# Altium PCB ThreePhaseMLI.PcbDoc (part 1 of 3)
Units mm, origin at the board's own origin, x right, y up, seen from the top; angles counter-clockwise.
Board outline 158.68 x 188.03 mm, 2 copper layers (Top Layer, Bottom Layer); 228 components, 175 nets, 606 pads, 93 vias.
Unrouted connection lines stored in the file: 12.
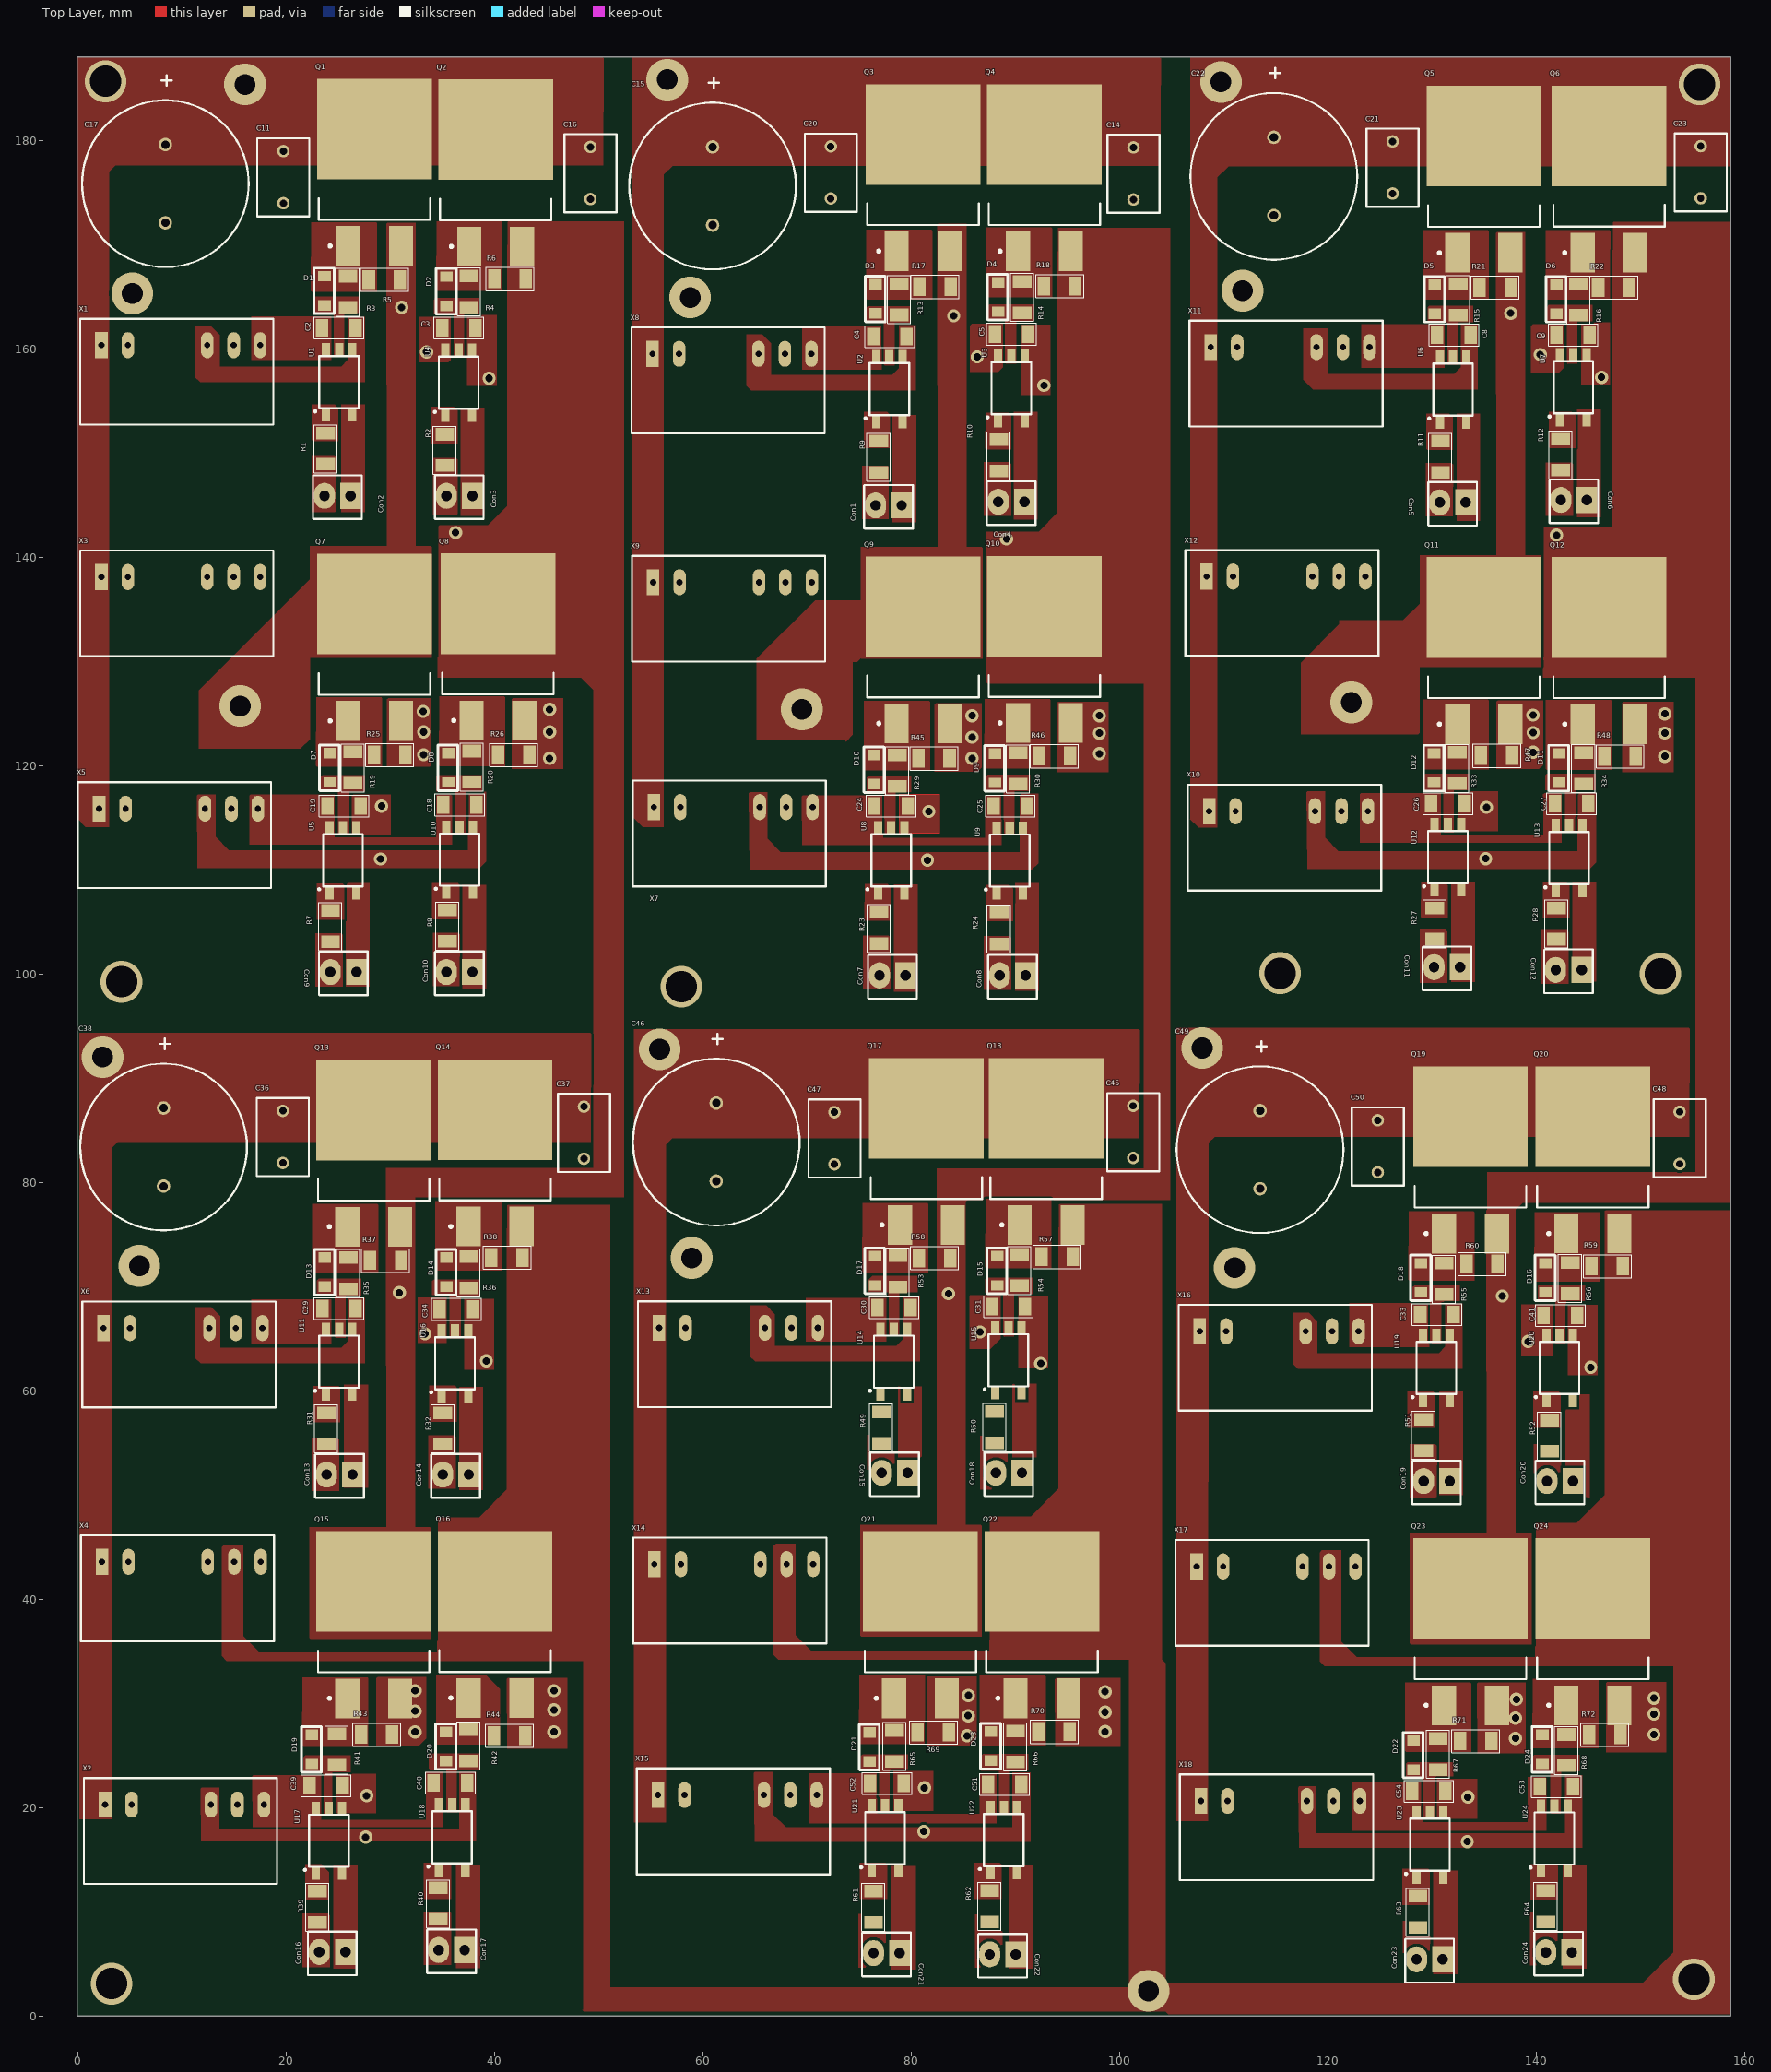
[diagram p0: Top Layer view]
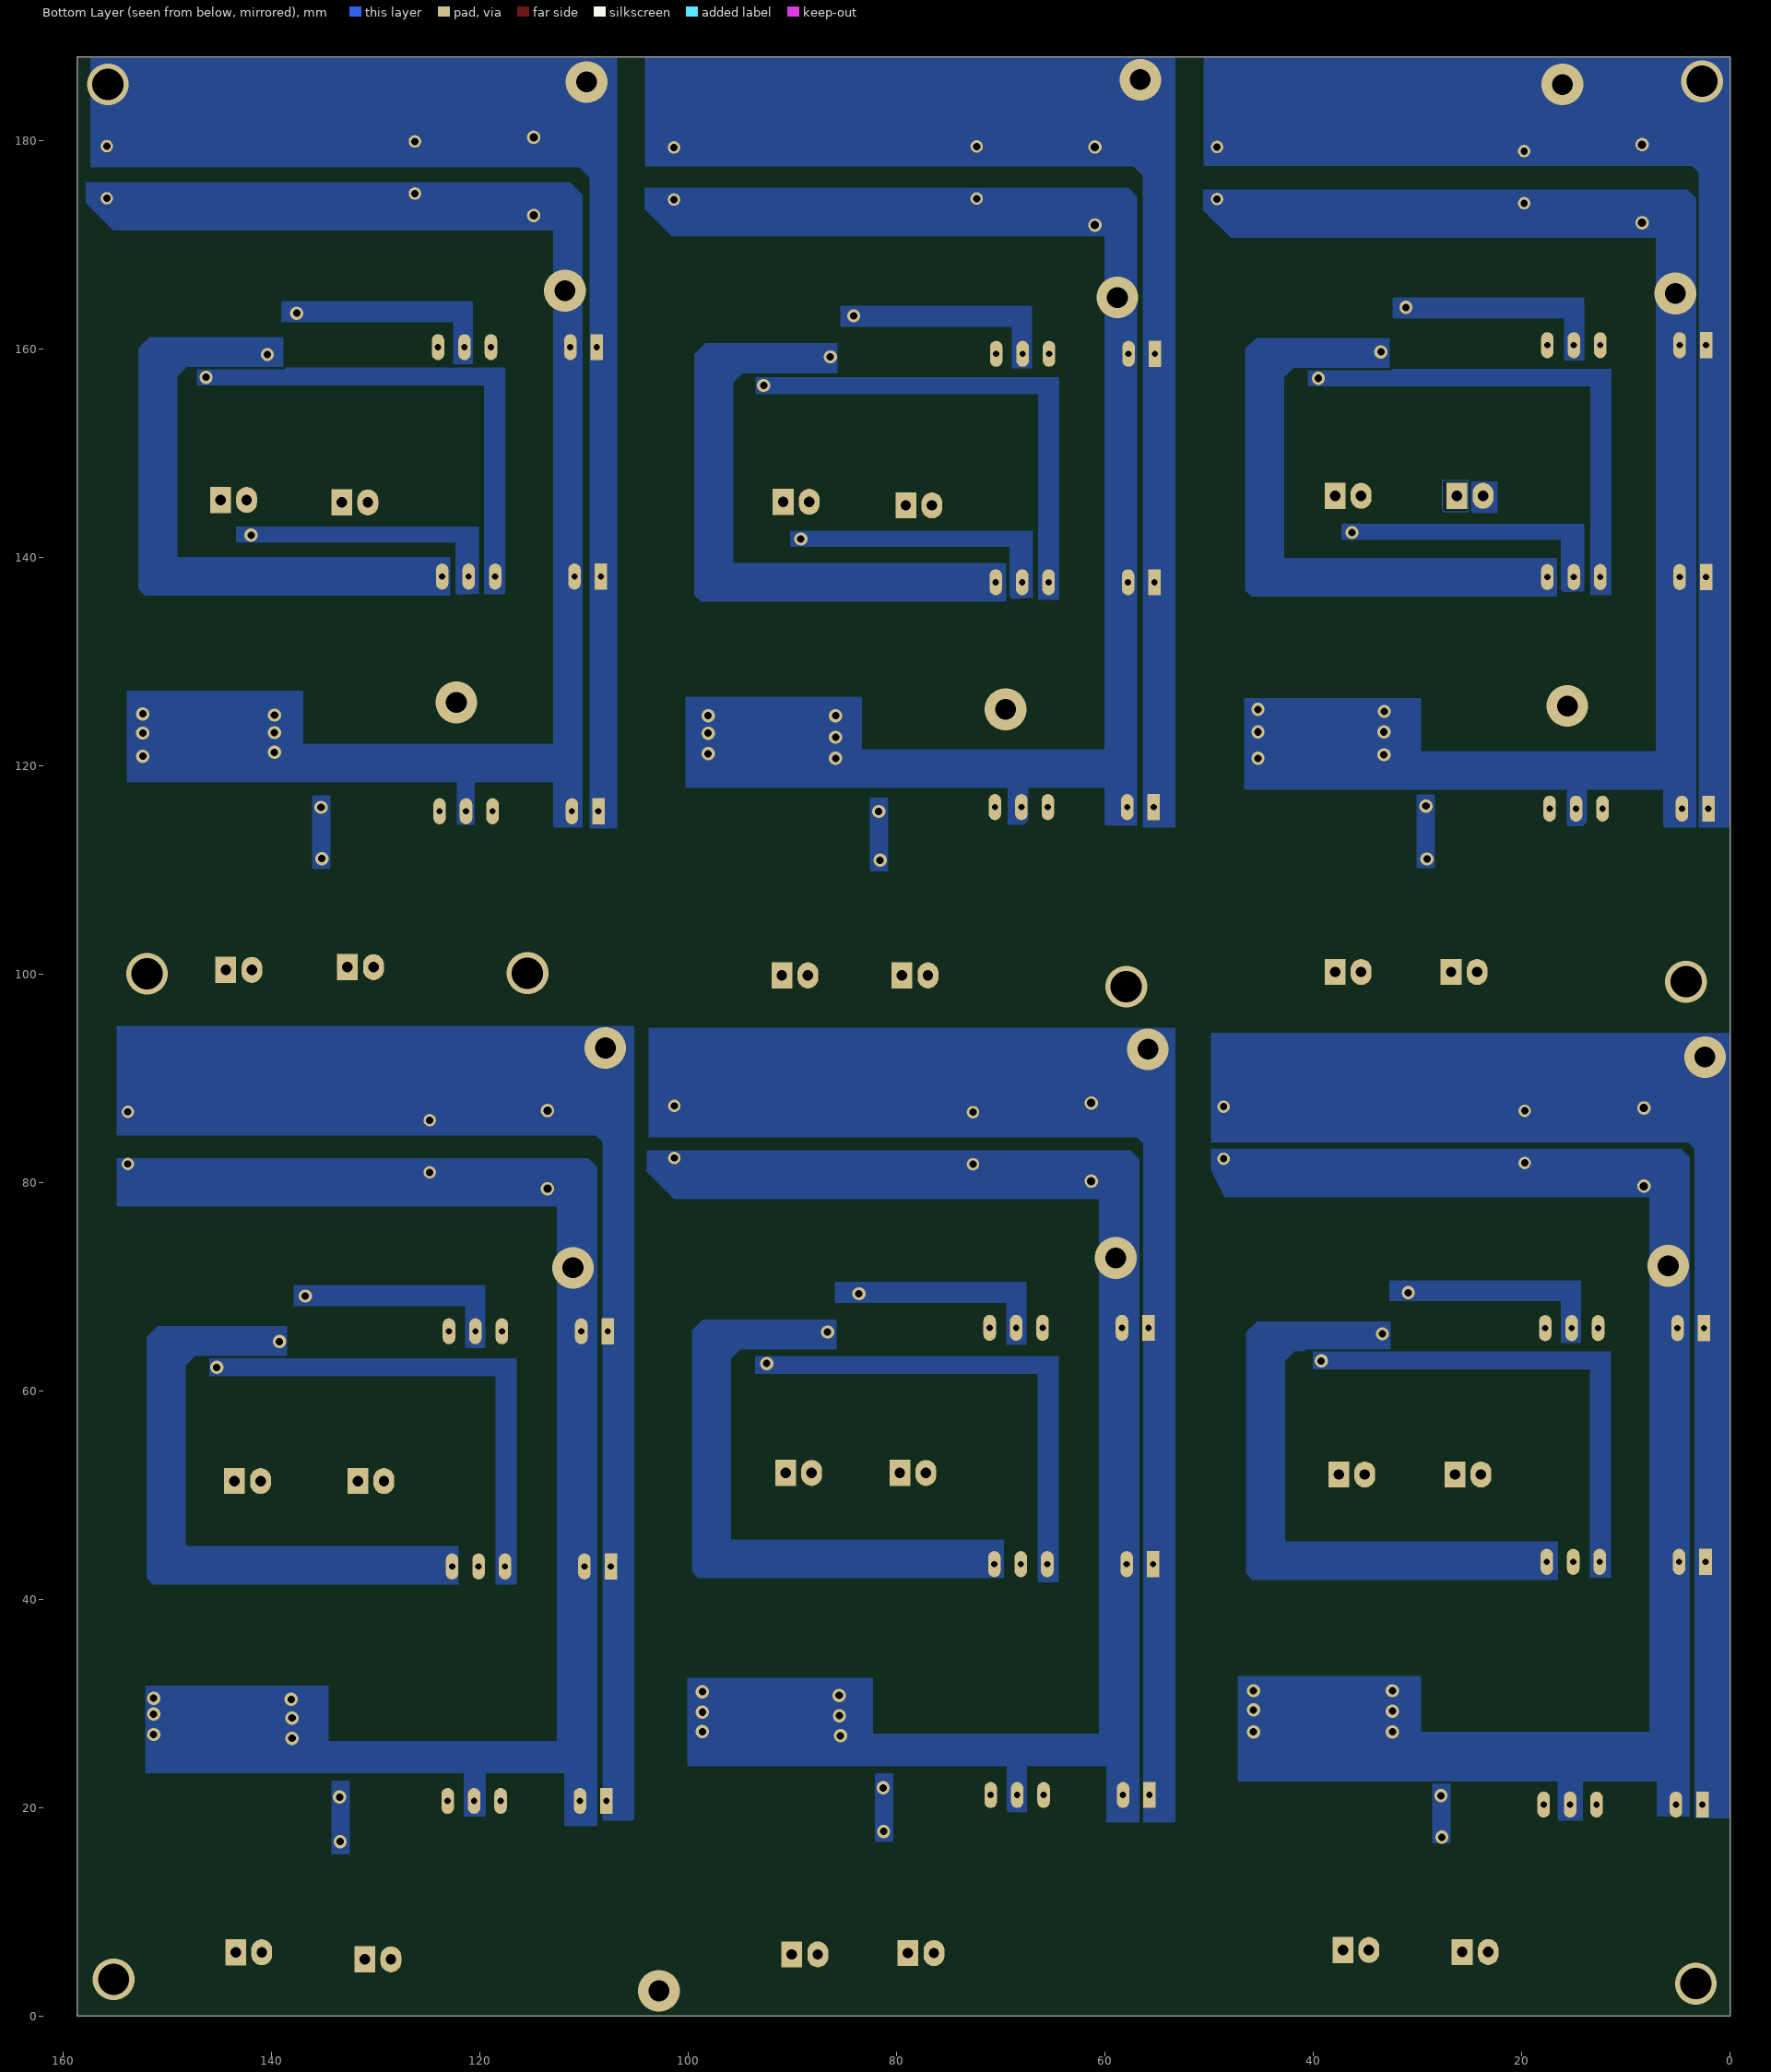
[diagram p1: Bottom Layer view, seen from below]
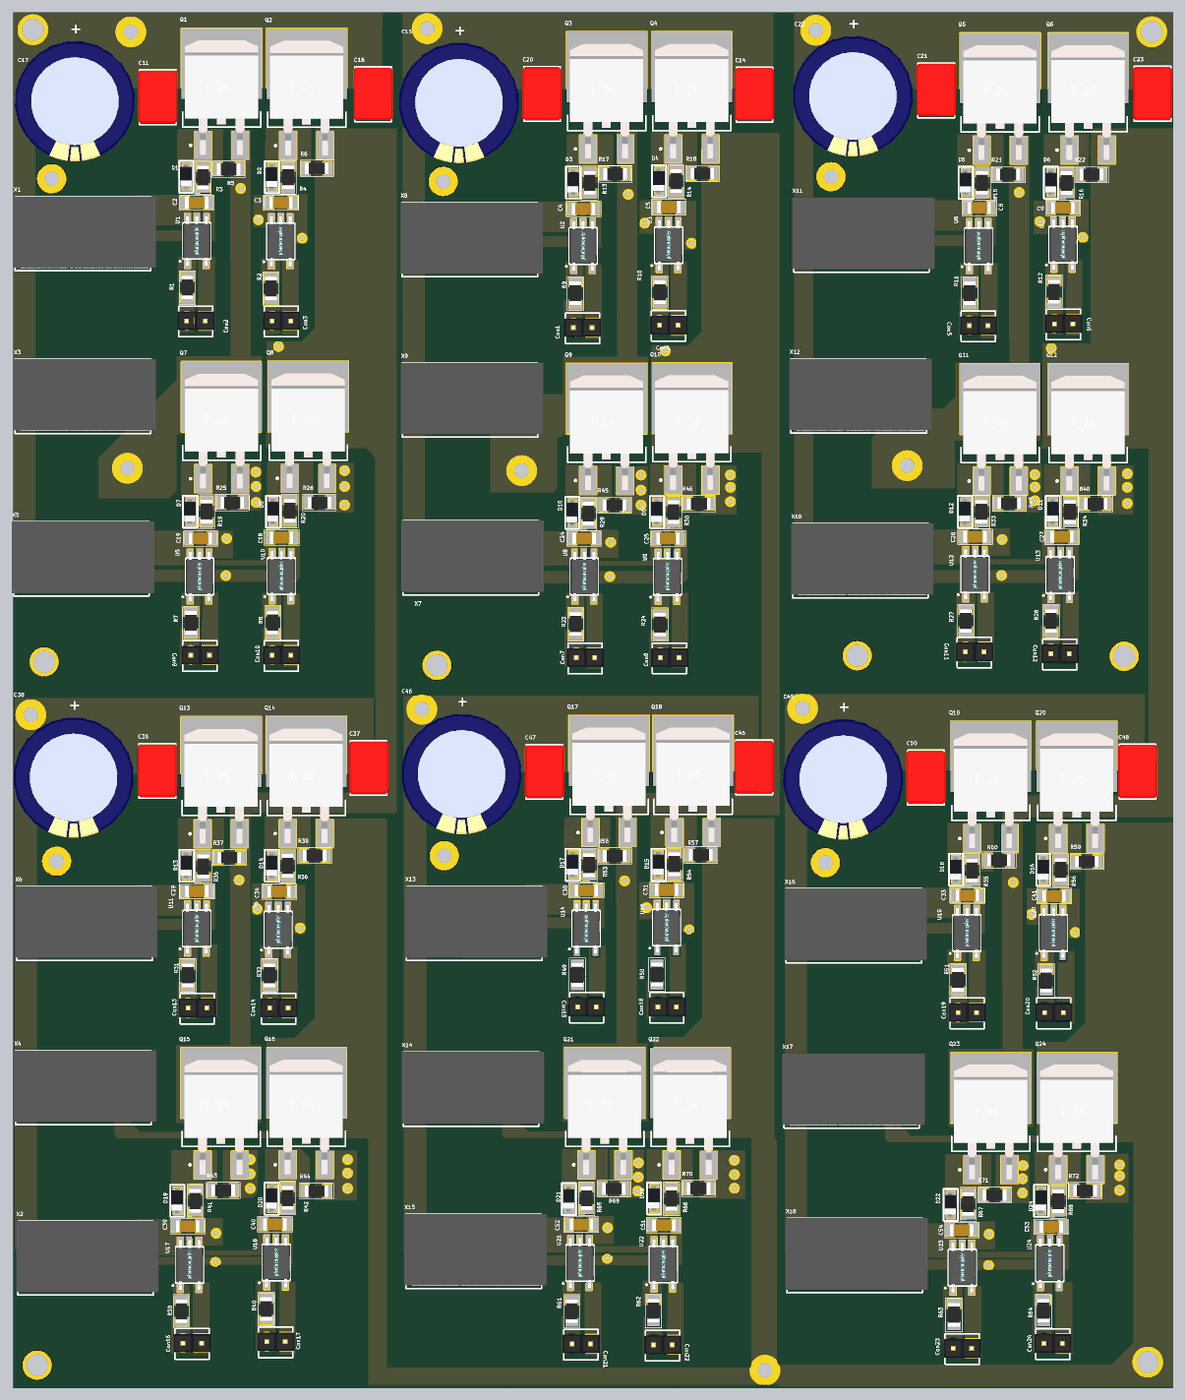
[diagram p3: 3D render of the assembled board from above, using the file's embedded part models]

## Layer stack, top to bottom
Top Solder: solder mask 0.0102, Solder Resist, Dk 3.5
Top Layer: signal copper 0.0356
Dielectric 1: dielectric 0.32, FR-4, Dk 4.8
Bottom Layer: signal copper 0.0356
Bottom Solder: solder mask 0.0102, Solder Resist, Dk 3.5

## Board outline
-0.025,0 -0.025,188.025 158.65,188.025 158.65,0

## Design rules (kind name [scope] priority, off if disabled: settings)
Clearance [All] p1: gap=0.254 ignorepadtopadclearanceinfootprint=FALSE except(0: Arc-Hole Track-Hole SMDPad-Hole THPad-Hole Via-Hole Fill-Hole Poly-Hole Region-Hole Text-Hole)
Height [All] p1: minheight=0 maxheight=76.2 prefheight=12.7
PolygonConnect [All] p1: connectstyle=Direct reliefconductorwidth=0.254 reliefentries=4 polygonreliefangle="90 Angle" airgapwidth=0.254
RoutingVias [All] p1: holewidth=0.711 width=1.27 viastyle="Through Hole" minholewidth=0.711 minwidth=1.27 maxholewidth=0.711 maxwidth=1.27
SolderMaskExpansion [All] p1: expansion=0.102 istentingtop=FALSE
Width [All] p1: maxlimit=1 minlimit=0.254 preferedwidth=0.254 minimp=50.000000 maximp=50.000000 favimp=50.000000
29 further rules are at their usual default settings.

## Components (designator, comment, footprint, x,y, rotation, side; value= is the part's Value field where it differs from the comment)
C2 "uF" C-1206 25.075,162.025 r180 top
C3 "uF" C-1206 36.6,162.025 r180 top
C4 "uF" C-1206 77.975,161.175 r180 top
C5 "uF" C-1206 89.65,161.425 r180 top
C8 "uF" C-1206 132.1,161.325 r180 top
C9 "uF" C-1206 143.55,161.325 r180 top
C11 "470pF" "100v 470pF" 19.75,173.975 r90 top
C14 "470pF" "100v 470pF" 101.35,174.325 r90 top
C15 "50v 4700uF" "63v 2200uF" 60.95,171.875 r90 top
C16 "470pF" "100v 470pF" 49.225,174.375 r90 top
C17 "50v 4700uF" "63v 2200uF" 8.425,172.1 r90 top
C18 "uF" C-1206 36.675,116.25 r180 top
C19 "uF" C-1206 25.575,116.125 r180 top
C20 "470pF" "100v 470pF" 72.3,174.425 r90 top
C21 "470pF" "100v 470pF" 126.225,174.9 r90 top
C22 "50v 4700uF" "63v 2200uF" 114.825,172.8 r90 top
C23 "470pF" "100v 470pF" 155.8,174.45 r90 top
C24 "uF" C-1206 78.075,116.125 r180 top
C25 "uF" C-1206 89.525,116.125 r180 top
C26 "uF" C-1206 131.525,116.35 r180 top
C27 "uF" C-1206 143.396,116.35 r180 top
C29 "uF" C-1206 25.1,67.9 r180 top
C30 "uF" C-1206 78.375,68 r180 top
C31 "uF" C-1206 89.35,68.075 r180 top
C33 "uF" C-1206 130.475,67.325 r180 top
C34 "uF" C-1206 36.35,67.85 r180 top
C36 "470pF" "100v 470pF" 19.7,81.875 r90 top
C37 "470pF" "100v 470pF" 48.6,82.275 r90 top
C38 "50v 4700uF" "63v 2200uF" 8.25,79.65 r90 top
C39 "uF" C-1206 23.85,22.114 r180 top
C40 "uF" C-1206 35.775,22.375 r180 top
C41 "uF" C-1206 142.325,67.25 r180 top
C45 "470pF" "100v 470pF" 101.325,82.35 r90 top
C46 "50v 4700uF" "63v 2200uF" 61.3,80.125 r90 top
C47 "470pF" "100v 470pF" 72.65,81.75 r90 top
C48 "470pF" "100v 470pF" 153.775,81.775 r90 top
C49 "50v 4700uF" "63v 2200uF" 113.5,79.4 r90 top
C50 "470pF" "100v 470pF" 124.8,80.975 r90 top
C51 "uF" C-1206 88.975,22.25 r180 top
C52 "uF" C-1206 77.682,22.325 r180 top
C53 "uF" C-1206 141.95,22.025 r180 top
C54 "uF" C-1206 129.7,21.575 r180 top
Con1 "Connector2" Conn 79.075,144.975 r270 top
Con2 "Connector2" Conn 26.176,145.9 r270 top
Con3 "Connector2" Conn 37.875,145.9 r270 top
Con4 "Connector2" Conn 90.85,145.325 r270 top
Con5 "Connector2" Conn 133.219,145.26 r270 top
Con6 "Connector2" Conn 144.85,145.5 r270 top
Con7 "Connector2" Conn 79.45,99.875 r270 top
Con8 "Connector2" Conn 90.975,99.875 r270 top
Con9 "Connector2" Conn 26.741,100.2 r270 top
Con10 "Connector2" Conn 37.876,100.2 r270 top
Con11 "Connector2" Conn 132.675,100.667 r270 top
Con12 "Connector2" Conn 144.35,100.4 r270 top
Con13 "Connector2" Conn 26.375,51.975 r270 top
Con14 "Connector2" Conn 37.525,51.975 r270 top
Con15 "Connector2" Conn 79.65,52.125 r270 top
Con16 "Connector2" Conn 25.675,6.15 r270 top
Con17 "Connector2" Conn 37.125,6.35 r270 top
Con18 "Connector2" Conn 90.616,52.125 r270 top
Con19 "Connector2" Conn 131.675,51.35 r270 top
Con20 "Connector2" Conn 143.516,51.35 r270 top
Con21 "Connector2" Conn 78.875,6.05 r270 top
Con22 "Connector2" Conn 90.025,5.925 r270 top
Con23 "Connector2" Conn 131.001,5.45 r270 top
Con24 "Connector2" Conn 143.4,6.125 r270 top
D1 "1n4148" B5819 23.701,164.175 r90 top
D2 "1n4148" B5819 35.4,164.125 r90 top
D3 "1n4148" B5819 76.6,163.4 r90 top
D4 "1n4148" B5819 88.35,163.575 r90 top
D5 "1n4148" B5819 130.275,163.375 r90 top
D6 "1n4148" B5819 141.95,163.375 r90 top
D7 "1n4148" B5819 24.201,118.4 r90 top
D8 "1n4148" B5819 35.572,118.4 r90 top
D9 "1n4148" B5819 88.05,118.35 r90 top
D10 "1n4148" B5819 76.475,118.231 r90 top
D11 "1n4148" B5819 142.2,118.375 r90 top
D12 "1n4148" B5819 130.2,118.375 r90 top
D13 "1n4148" B5819 23.725,70 r90 top
D14 "1n4148" B5819 35.397,70 r90 top
D15 "1n4148" B5819 88.275,70.125 r90 top
D16 "1n4148" B5819 140.9,69.45 r90 top
D17 "1n4148" B5819 76.543,70.125 r90 top
D18 "1n4148" B5819 128.95,69.45 r90 top
D19 "1n4148" B5819 22.475,24.2 r90 top
D20 "1n4148" B5819 35.375,24.481 r90 top
D21 "1n4148" B5819 76.025,24.425 r90 top
D22 "1n4148" B5819 128.225,23.65 r90 top
D23 "1n4148" B5819 87.675,24.525 r90 top
D24 "1n4148" B5819 140.6,24.2 r90 top
Q1 "irfz44" DPAK_TO263 28.493,176.076 r90 top
Q2 "irfz44" DPAK_TO263 40.125,176.025 r90 top
Q3 "irfz44" DPAK_TO263 81.148,175.577 r90 top
Q4 "irfz44" DPAK_TO263 92.8,175.575 r90 top
Q5 "irfz44" DPAK_TO263 134.973,175.412 r90 top
Q6 "irfz44" DPAK_TO263 147,175.425 r90 top
Q7 "irfz44" DPAK_TO263 28.493,130.5 r90 top
Q8 "irfz44" DPAK_TO263 40.35,130.537 r90 top
Q9 "irfz44" DPAK_TO263 81.148,130.25 r90 top
Q10 "irfz44" DPAK_TO263 92.8,130.3 r90 top
Q11 "irfz44" DPAK_TO263 134.973,130.181 r90 top
Q12 "irfz44" DPAK_TO263 147,130.181 r90 top
Q13 "irfz44" DPAK_TO263 28.425,81.95 r90 top
Q14 "irfz44" DPAK_TO263 40.075,81.975 r90 top
Q15 "irfz44" DPAK_TO263 28.425,36.695 r90 top
Q16 "irfz44" DPAK_TO263 40.075,36.725 r90 top
Q17 "irfz44" DPAK_TO263 81.475,82.125 r90 top
Q18 "irfz44" DPAK_TO263 92.965,82.125 r90 top
Q19 "irfz44" DPAK_TO263 133.69,81.3 r90 top
Q20 "irfz44" DPAK_TO263 145.45,81.3 r90 top
Q21 "irfz44" DPAK_TO263 80.9,36.7 r90 top
Q22 "irfz44" DPAK_TO263 92.575,36.7 r90 top
Q23 "irfz44" DPAK_TO263 133.69,36.031 r90 top
Q24 "irfz44" DPAK_TO263 145.45,36.031 r90 top
R1 "R-1206" R-1206 23.825,150.425 r90 top
R2 "R-1206" R-1206 35.25,150.3 r90 top
R3 "R-1206" R-1206 25.953,165.475 r90 top
R4 "R-1206" R-1206 37.585,165.5 r90 top
R5 "R-1206" R-1206 29.45,166.65 r180 top
R6 "R-1206" R-1206 41.5,166.725 r180 top
R7 "R-1206" R-1206 24.275,104.6 r90 top
R8 "R-1206" R-1206 35.5,104.65 r90 top
R9 "R-1206" R-1206 76.9,149.65 r90 top
R10 "R-1206" R-1206 88.425,149.775 r90 top
R11 "R-1206" R-1206 130.825,149.65 r90 top
R12 "R-1206" R-1206 142.35,149.85 r90 top
R13 "R-1206" R-1206 78.865,164.756 r90 top
R14 "R-1206" R-1206 90.675,164.975 r90 top
R15 "R-1206" R-1206 132.518,164.746 r90 top
R16 "R-1206" R-1206 144.077,164.72 r90 top
R17 "R-1206" R-1206 82.3,165.975 r180 top
R18 "R-1206" R-1206 94.25,166.025 r180 top
R19 "R-1206" R-1206 26.425,119.817 r90 top
R20 "R-1206" R-1206 37.85,119.9 r90 top
R21 "R-1206" R-1206 136.05,165.9 r180 top
R22 "R-1206" R-1206 147.45,165.9 r180 top
R23 "R-1206" R-1206 76.925,104.425 r90 top
R24 "R-1206" R-1206 88.45,104.375 r90 top
R25 "R-1206" R-1206 29.95,121.05 r180 top
R26 "R-1206" R-1206 41.85,121.05 r180 top
R27 "R-1206" R-1206 130.275,104.85 r90 top
R28 "R-1206" R-1206 141.95,104.85 r90 top
R29 "R-1206" R-1206 78.675,119.525 r90 top
R30 "R-1206" R-1206 90.296,119.731 r90 top
R31 "R-1206" R-1206 23.875,56.4 r90 top
R32 "R-1206" R-1206 35.05,56.4 r90 top
R33 "R-1206" R-1206 132.425,119.775 r90 top
R34 "R-1206" R-1206 144.55,119.75 r90 top
R35 "R-1206" R-1206 26,71.3 r90 top
R36 "R-1206" R-1206 37.55,71.366 r90 top
R37 "R-1206" R-1206 29.55,72.525 r180 top
R38 "R-1206" R-1206 41.205,72.8 r180 top
R39 "R-1206" R-1206 23.025,10.5 r90 top
R40 "R-1206" R-1206 34.605,10.8 r90 top
R41 "R-1206" R-1206 24.9,25.575 r90 top
R42 "R-1206" R-1206 37.535,25.981 r90 top
R43 "R-1206" R-1206 28.7,27.025 r180 top
R44 "R-1206" R-1206 41.45,26.925 r180 top
R45 "R-1206" R-1206 82.2,120.7 r180 top
R46 "R-1206" R-1206 93.75,120.925 r180 top
R47 "R-1206" R-1206 136.206,120.975 r180 top
R48 "R-1206" R-1206 148.05,120.9 r180 top
R49 "R-1206" R-1206 77.15,56.475 r90 top
R50 "R-1206" R-1206 88.025,56.525 r90 top
R51 "R-1206" R-1206 129.2,55.775 r90 top
R52 "R-1206" R-1206 141.275,55.7 r90 top
R53 "R-1206" R-1206 78.746,71.466 r90 top
R54 "R-1206" R-1206 90.425,71.6 r90 top
R55 "R-1206" R-1206 131.15,70.75 r90 top
R56 "R-1206" R-1206 143.271,70.821 r90 top
R57 "R-1206" R-1206 94.025,72.875 r180 top
R58 "R-1206" R-1206 82.25,72.75 r180 top
R59 "R-1206" R-1206 146.825,71.975 r180 top
R60 "R-1206" R-1206 134.8,72.175 r180 top
R61 "R-1206" R-1206 76.4,10.5 r90 top
R62 "R-1206" R-1206 87.55,10.55 r90 top
R63 "R-1206" R-1206 128.65,10 r90 top
R64 "R-1206" R-1206 140.925,10.55 r90 top
R65 "R-1206" R-1206 78.425,25.925 r90 top
R66 "R-1206" R-1206 90.025,25.875 r90 top
R67 "R-1206" R-1206 130.6,25.15 r90 top
R68 "R-1206" R-1206 142.91,25.525 r90 top
R69 "R-1206" R-1206 82.125,27.25 r180 top
R70 "R-1206" R-1206 93.725,27.3 r180 top
R71 "R-1206" R-1206 134.2,26.4 r180 top
R72 "R-1206" R-1206 146.58,27 r180 top
U1 "TLP152" TLP152 25.35,156.8 r90 top
U2 "TLP152" TLP152 78.175,156.125 r90 top
U3 "TLP152" TLP152 89.875,156.225 r90 top
U4 "TLP152" TLP152 36.825,156.75 r90 top
U5 "TLP152" TLP152 25.725,110.925 r90 top
U6 "TLP152" TLP152 132.279,156.1 r90 top
U7 "TLP152" TLP152 143.825,156.3 r90 top
U8 "TLP152" TLP152 78.35,110.925 r90 top
U9 "TLP152" TLP152 89.725,110.9 r90 top
U10 "TLP152" TLP152 36.925,110.975 r90 top
U11 "TLP152" TLP152 25.35,62.8 r90 top
U12 "TLP152" TLP152 131.775,111.225 r90 top
U13 "TLP152" TLP152 143.425,111.125 r90 top
U14 "TLP152" TLP152 78.6,62.8 r90 top
U15 "TLP152" TLP152 89.6,62.925 r90 top
U16 "TLP152" TLP152 36.479,62.65 r90 top
U17 "TLP152" TLP152 24.369,16.825 r90 top
U18 "TLP152" TLP152 36.2,17.15 r90 top
U19 "TLP152" TLP152 130.675,62.2 r90 top
U20 "TLP152" TLP152 142.5,62.2 r90 top
U21 "TLP152" TLP152 77.75,17.075 r90 top
U22 "TLP152" TLP152 89.154,16.9 r90 top
U23 "TLP152" TLP152 130.05,16.45 r90 top
U24 "TLP152" TLP152 142.003,17.05 r90 top
X1 "R24P21503D" SIP7 2.285,160.35 r90 top
X2 "R24P21503D" SIP7 2.64,20.3 r90 top
X3 "R24P21503D" SIP7 2.285,138.1 r90 top
X4 "R24P21503D" SIP7 2.34,43.6 r90 top
X5 "R24P21503D" SIP7 2.065,115.875 r90 top
X6 "R24P21503D" SIP7 2.49,66.025 r90 top
X7 "R24P21503D" SIP7 55.31,116.025 r90 top
X8 "R24P21503D" SIP7 55.19,159.525 r90 top
X9 "R24P21503D" SIP7 55.235,137.6 r90 top
X10 "R24P21503D" SIP7 108.615,115.625 r90 top
X11 "R24P21503D" SIP7 108.765,160.165 r90 top
X12 "R24P21503D" SIP7 108.365,138.15 r90 top
X13 "R24P21503D" SIP7 55.815,66.05 r90 top
X14 "R24P21503D" SIP7 55.365,43.375 r90 top
X15 "R24P21503D" SIP7 55.715,21.221 r90 top
X16 "R24P21503D" SIP7 107.715,65.725 r90 top
X17 "R24P21503D" SIP7 107.415,43.15 r90 top
X18 "R24P21503D" SIP7 107.84,20.65 r90 top

## Footprints (in the part's own frame and the unit in brackets; to place one, negate y for a bottom-side part, rotate by r counter-clockwise, add the part's x,y. Pads: shape width x height; smd on the part's side, far side on the other; paste and mask are expansions set on the pad)
"63v 2200uF" [mm]
  round 1.3 hole 0.8: 1(0,0) 2(7.5,0)
  silkscreen extent -4.25,-8 14.16,8, body extent -4.44,-8.25 12.06,8.25, height 26.11
"100v 470pF" [mm]
  round 1.2 hole 0.7: 1(0,0) 2(5,0)
  silkscreen extent -1.27,-2.5 6.22,2.5, body extent -1.06,-2.7 6.14,2.7, height 7
B5819 [mm]
  rect 1x1.2 smd: 1(0,0) 2(2.8,0)
  silkscreen extent -0.8,-0.92 3.57,1, body extent -0.45,-0.72 3.25,0.88, height 1.28
C-1206 [mm]
  rect 1.2x1.7 smd: 1(-1.6,0) 2(1.6,0)
  silkscreen extent -2.4,-1.05 2.37,1.05, body extent -1.6,-0.8 1.6,0.8, height 1
Conn [mm]
  rect 2.5x2 hole 1: 1(0,0.025)
  oval 2.5x2 hole 1: 2(0,-2.475)
  silkscreen extent -1.96,-3.57 2.22,1.1, body extent -5,-3.74 1.3,1.34, height 8.15
DPAK_TO263 [mm] "D2-PAK, 3-Pads, Body 7.93x8.70mm (max), IPC Medium Density"
  rect 3.81x2.32 smd: 1(-6.2,2.54) 3(-6.2,-2.54)
  rect 9.65x11 smd: 2(5,0)
  silkscreen extent -6.32,-5.35 -1.62,5.35, body extent -7.51,-4.98 8.16,5.02, height 4.81
R-1206 [mm]
  rect 1.2x1.8 smd: 1(-1.5,0) 2(1.5,0)
  silkscreen extent -2.32,-1.1 2.27,1.12, body extent -1.6,-0.78 1.6,0.83, height 0.56
SIP7 [mm]
  rect 2.5x1.2 hole 0.6: 1(0,0)
  oval 2.5x1.2 hole 0.6: 2(0,-2.54) 5(0,-10.16) 6(0,-12.7) 7(0,-15.24)
  silkscreen extent -7.62,-16.51 2.54,2.03, body extent -7.24,-17.24 2.58,2.26, height 11.66
TLP152 [mm] "SOTFL, 5-Leads, Body 3.75x7.20mm, Pitch 1.27mm, IPC Medium Density"
  rect 1.2x0.8 smd: 1(-3.15,1.524) 2(-3.15,-1.016) 3(3.15,-1.016) 4(3.15,0.254) 5(3.15,1.524)
  silkscreen extent -2.87,-1.65 2.5,2.61, body extent -3.39,-1.65 3.38,2.15, height 2.11

## Part data
C2 C3 C4 C5 C8 C9 C18 C19 C24 C25 C26 C27 C29 C30 C31 C33 C34 C39 C40 C41 C51 C52 C53 C54: library part C-1206
C11 C14 C16 C20 C21 C23 C36 C37 C45 C47 C48 C50: library part "100v 470p cap"
C15 C17 C22 C38 C46 C49: library part "Aluminum Electrolytic Capacitors", "PKL5-063V472MM450 Aluminum Electrolytic Capacitors - Snap In 63volts 4700uF 20%", Capacitance=4.7mF, Case/Package=Radial, Manufacturer=Nichicon, Manufacturer Part Number=LKS1J472MESZ, Max Operating Temperature=85°C, Min Operating Temperature=-40°C, Package Quantity=250, Ripple Current=3A, Supplier Part Number 1=647-LKS1J472MESZ, Tolerance=20%, Voltage Rating=63V, ComponentLink2Description=https://www.ozdisan.com/pasif-komponentler/kondansatorler/aluminyum-kondansatorler/PKL5-063V472MM450, ComponentLink2URL=https://www.ozdisan.com/pasif-komponentler/kondansatorler/aluminyum-kondansatorler/PKL5-063V472MM450, Diameter=22mm, Height - Seated (Max)=1.772inch, Lead Pitch=0.394inch, Length=45mm, Life (Hours)=1000Hour, Mount="Through Hole", Packaging=Bulk, RoHS=Yes, Supplier 1=Mouser, Termination="Snap in", Voltage Rating (DC)=63V
D1 D2 D3 D4 D5 D6 D7 D8 D9 D10 D11 D12 D13 D14 D15 D16 D17 D18 D19 D20 D21 D22 D23 D24: library part 1N4148W-E3-18, "Diode Small Signal Switching 100V 0.15A 2-Pin SOD-123 T/R", Average Rectified Current=150mA, Forward Voltage=1.2V, Manufacturer=Vishay, Max Operating Temperature=150°C, Max Power Dissipation=350mW, Max Repetitive Reverse Voltage (Vrrm)=100V, Max Reverse Leakage Current=5uA, Max Reverse Voltage (DC)=75V, Max Surge Current=2A, Min Operating Temperature=-55°C, Package Quantity=10000, Peak Reverse Current=100uA, Supplier Part Number 1=70061597, ComponentLink1Description=https://datasheet.ciiva.com/29885/1n4148w-29885941.pdf?src-supplier=Avnet, ComponentLink1URL=https://datasheet.ciiva.com/29885/1n4148w-29885941.pdf?src-supplier=Avnet, ComponentLink2Description=https://datasheet.ciiva.com/29593/1n4148w-29593113.pdf?src-supplier=Digi-Key, ComponentLink2URL=https://datasheet.ciiva.com/29593/1n4148w-29593113.pdf?src-supplier=Digi-Key, ComponentLink3Description=https://datasheet.ciiva.com/29593/1n4148w-29593111.pdf?src-supplier=Digi-Key, ComponentLink3URL=https://datasheet.ciiva.com/29593/1n4148w-29593111.pdf?src-supplier=Digi-Key, ComponentLink4Description=https://datasheet.ciiva.com/29593/1n4148w-29593112.pdf?src-supplier=Digi-Key, ComponentLink4URL=https://datasheet.ciiva.com/29593/1n4148w-29593112.pdf?src-supplier=Digi-Key, Contact Plating=Tin, Element Configuration=Single, Forward Current=150mA, Height=1.25mm, Lead Free="Lead Free", Length=2.85mm, Manufacturer Part Number=1N4148W-E3-18, Mount="Surface Mount", Number of Pins=2, Packaging="Tape and Reel", Peak Non-Repetitive Surge Current=2A, Power Dissipation=350mW, Pricing 1="1 = 0.03900, 25 = 0.03800, 100 = 0.03600, 250 = 0.03400, 500 = 0.03200, 1000 = 0.03100, 2500 = 0.02900 (USD)", Radiation Hardening=No, Recovery Time=4ns, Reverse Recovery Time=4ns, RoHS=Yes, Stock 1=6838, Supplier 1="Allied Electronics", Weight=0.000363oz, Width=1.7mm
Q1 Q2 Q3 Q4 Q5 Q6 Q7 Q8 Q9 Q10 Q11 Q12 Q13 Q14 Q15 Q16 Q17 Q18 Q19 Q20 Q21 Q22 Q23 Q24: library part "To220 Mosfet"
R1 R2 R3 R4 R5 R6 R7 R8 R9 R10 R11 R12 R13 R14 R15 R16 R17 R18 R19 R20 R21 R22 R23 R24 R25 R26 R27 R28 R29 R30 R31 R32 R33 R34 R35 R36 R37 R38 R39 R40 R41 R42 R43 R44 R45 R46 R47 R48 R49 R50 R51 R52 R53 R54 R55 R56 R57 R58 R59 R60 R61 R62 R63 R64 R65 R66 R67 R68 R69 R70 R71 R72: "Res1206"
U1 U2 U3 U4 U5 U6 U7 U8 U9 U10 U11 U12 U13 U14 U15 U16 U17 U18 U19 U20 U21 U22 U23 U24: library part TLP152(TPL,E, "OPTOISO 3.75KV GATE DRIVER 6SO-5", Case/Package=SO, Forward Current=10mA, Forward Voltage=1.57V, High Level Output Current=2A, Manufacturer=Toshiba, Max Operating Temperature=100°C, Max Output Current=2.5A, Max Power Dissipation=260mW, Min Operating Temperature=-40°C, Package Quantity=3000, Supplier Part Number 1=757-TLP152TPLE, ComponentLink1Description=https://datasheet.ciiva.com/41848/tlp152-datasheet-en-20120914-41848928.pdf?src-supplier=Digi-Key, ComponentLink1URL=https://datasheet.ciiva.com/41848/tlp152-datasheet-en-20120914-41848928.pdf?src-supplier=Digi-Key, Direction=Unidirectional, Fall Time=22ns, Low Level Output Current=2A, Manufacturer Part Number=TLP152(TPL,E, Mount="Surface Mount", Number of Channels=1, Number of Pins=5, Output Current=2.5A, Packaging="Tape and Reel", Pricing 1="1 = 1.55000, 10 = 0.96800, 50 = 0.96800, 100 = 0.87200, 1000 = 0.54300, 10000 = 0.44000 (USD)", Propagation Delay=165ns, Pulse Width Distortion (PWD)=50ns, Rise Time=18ns, RoHS=Yes, Stock 1=22321, Supplier 1=Mouser, Turn-On Delay Time=190ns
X1 X2 X3 X4 X5 X6 X7 X8 X9 X10 X11 X12 X13 X14 X15 X16 X17 X18: "DC/DC CONV 2W 12VDC +15/-3VDC 93mA/-185mA SIP7", Manufacturer=RECOM, Özdisan Part Number=R12P21503D, Link=https://www.ozdisan.com/guc-kaynaklari-adaptorler/izole-donusturucu-moduller/dcdc-donusturuculer/R12P21503D, Price=11,27149
Con1 Con2 Con3 Con4 Con5 Con6 Con7 Con8 Con9 Con10 Con11 Con12 Con13 Con14 Con15 Con16 Con17 Con18 Con19 Con20 Con21 Con22 Con23 Con24: System=Connector

## Via types
v1: diameter 1.27, hole 0.711, Top Layer to Bottom Layer, 69 vias
v2: diameter 4, hole 2, Top Layer to Bottom Layer, 16 vias
v3: diameter 4, hole 3, Top Layer to Bottom Layer, 8 vias

## Nets (pads, with @x,y where several pads share a name; then routed paths per layer and width w, separated by ;. In a path a pad name is that pad's centre, name@x,y a point inside that pad or via, vN(x,y) a via of type N, cw(c..) or ccw(c..) an arc to the next point about the centre after c; other vN are vias at no path point)
1: Q2.3 Q8.2 Q13.3 Q15.2 R6.1 R37.1 X3.6 X6.6
  other v1: 30.875,69.425 36.275,142.375
2: Q4.3 Q10.2 Q17.3 Q21.2 R18.1 R58.1 X9.6 X13.6
  other v1: 83.6,69.325 89.175,141.75
3: Q6.3 Q12.2 Q19.3 Q23.2 R22.1 R60.1 X12.6 X16.6
  other v1: 136.75,69.1 141.95,142.125
12v: C11.2 C16.2 C17.2 Q1.2 Q2.2 X1.1 X3.1 X5.1
  other v2: 16.075,185.375
  other v3: 2.675,185.675
12v_1: C36.2 C37.2 C38.2 Q13.2 Q14.2 X2.1 X4.1 X6.1
  other v2: 2.396,92.032
12v_2: C14.2 C15.2 C20.2 Q3.2 Q4.2 X7.1 X8.1 X9.1
  other v2: 56.596,185.832
12v_3: C45.2 C46.2 C47.2 Q17.2 Q18.2 X13.1 X14.1 X15.1
  other v2: 55.871,92.782
12v_4: C21.2 C22.2 C23.2 Q5.2 Q6.2 X10.1 X11.1 X12.1
  other v2: 109.746,185.607
  other v3: 155.69,185.389
12v_5: C48.2 C49.2 C50.2 Q19.2 Q20.2 X16.1 X17.1 X18.1
  other v2: 107.946,92.907
+15v: C2.2 U1.5 X1.7
+15v1: C3.2 U4.5 X3.7
  other v1: 33.5,159.7
+15v2: C18.2 C19.2 U5.5 U10.5 X5.7
+15v3: C29.2 U11.5 X6.7
+15v4: C34.2 U16.5 X4.7
  other v1: 33.35,65.475
+15v5: C39.2 C40.2 U17.5 U18.5 X2.7
+15v6: C4.2 U2.5 X8.7
+15v7: C5.2 U3.5 X9.7
  other v1: 86.35,159.225
+15v8: C24.2 C25.2 U8.5 U9.5 X7.7
+15v9: C30.2 U14.5 X13.7
+15v10: C31.2 U15.5 X14.7
  other v1: 86.615,65.65
+15v11: C51.2 C52.2 U21.5 U22.5 X15.7
+15v12: C8.2 U6.5 X11.7
+15v13: C9.2 U7.5 X12.7
  other v1: 140.387,159.45
+15v14: C26.2 C27.2 U12.5 U13.5 X10.7
+15v15: C33.2 U19.5 X16.7
+15v16: C41.2 U20.5 X17.7
  other v1: 139.225,64.736
+15v17: C53.2 C54.2 U23.5 U24.5 X18.7
-5v: C2.1 U1.3 X1.5
-5v1: C3.1 U4.3 X3.5
  other v1: 39.5,157.175
-5v2: C18.1 C19.1 U5.3 U10.3 X5.5
  other v1: 29.075,111.05 29.175,116.125
-5v3: C29.1 U11.3 X6.5
-5v4: C34.1 U16.3 X4.5
  other v1: 39.233,62.87
-5v5: C39.1 C40.1 U17.3 U18.3 X2.5
  other v1: 27.65,17.175 27.739,21.15
-5v6: C4.1 U2.3 X8.5
-5v7: C5.1 U3.3 X9.5
  other v1: 92.75,156.489
-5v8: C24.1 C25.1 U8.3 U9.3 X7.5
  other v1: 81.575,110.925 81.7,115.6
-5v9: C30.1 U14.3 X13.5
-5v10: C31.1 U15.3 X14.5
  other v1: 92.45,62.625
-5v11: C51.1 C52.1 U21.3 U22.3 X15.5
  other v1: 81.225,17.725 81.275,21.9
-5v12: C8.1 U6.3 X11.5
-5v13: C9.1 U7.3 X12.5
  other v1: 146.275,157.275
-5v14: C26.1 C27.1 U12.3 U13.3 X10.5
  other v1: 135.15,111.075 135.232,115.997
-5v15: C33.1 U19.3 X16.5
-5v16: C41.1 U20.3 X17.5
  other v1: 145.242,62.264
-5v17: C53.1 C54.1 U23.3 U24.3 X18.5
  other v1: 133.389,16.75 133.45,21.025
GND: C11.1 C16.1 C17.1 Q7.3 Q8.3 R25.1 R26.1 X1.2 X3.2 X5.2 X5.6
  other v1: 45.3,120.7 33.211,121.05 33.211,123.238 45.3,123.238 33.175,125.2 45.3,125.4
  other v2: 5.246,165.307
gnd4: Q14.3 Q16.2 Q18.3 Q20.3 Q22.2 Q24.2 R38.1 R57.1 R59.1 X4.6 X14.6 X17.6
  other v2: 102.797,2.423
  other v3: 155.14,3.539
gnd5: C36.1 C37.1 C38.1 Q15.3 Q16.3 R43.1 R44.1 X2.2 X2.6 X4.2 X6.2
  other v1: 32.395,27.281 45.725,27.281 32.395,29.267 45.725,29.376 32.395,31.225 45.725,31.225
  other v2: 5.921,72.007
gnd6: Q3.3 Q9.2 R17.1 X8.6
  other v1: 84.1,163.175
  other v2: 69.525,125.4
gnd8: C14.1 C15.1 C20.1 Q9.3 Q10.3 R45.1 R46.1 X7.2 X7.6 X8.2 X9.2
  other v1: 85.85,120.7 98.075,121.15 85.85,122.732 98.075,123.119 85.85,124.8 98.075,124.8
  other v2: 58.796,164.932
gnd11: C45.1 C46.1 C47.1 Q21.3 Q22.3 R69.1 R70.1 X13.2 X14.2 X15.2 X15.6
  other v1: 85.375,26.9 98.625,27.3 85.475,28.825 98.625,29.171 85.5,30.775 98.625,31.125
  other v2: 58.946,72.757
gnd12: Q5.3 Q11.2 R21.1 X11.6
  other v1: 137.562,163.424
  other v2: 122.25,126.075
gnd14: C21.1 C22.1 C23.1 Q11.3 Q12.3 R47.1 R48.1 X10.2 X10.6 X11.2 X12.2
  other v1: 152.35,120.9 139.716,121.275 152.35,123.121 139.716,123.165 139.7,124.85 152.35,124.975
  other v2: 111.821,165.582
gnd17: C48.1 C49.1 C50.1 Q23.3 Q24.3 R71.1 R72.1 X16.2 X17.2 X18.2 X18.6
  other v1: 138.02,26.65 151.3,27.025 138.02,28.606 151.3,28.989 138.1,30.4 151.3,30.5
  other v2: 111.051,71.813
gnd_: Q1.3 Q7.2 R5.1 X1.6
  other v1: 31.1,163.975
  other v2: 15.6,125.725
NetCon1_1: Con1.1 U2.2
NetCon1_2: Con1.2 R9.1
NetCon2_1: Con2.1 U1.2
NetCon2_2: Con2.2 R1.1
NetCon3_1: Con3.1 U4.2
NetCon3_2: Con3.2 R2.1
NetCon4_1: Con4.1 U3.2
NetCon4_2: Con4.2 R10.1
NetCon5_1: Con5.1 U6.2
NetCon5_2: Con5.2 R11.1
NetCon6_1: Con6.1 U7.2
NetCon6_2: Con6.2 R12.1
NetCon7_1: Con7.1 U8.2
NetCon7_2: Con7.2 R23.1
NetCon8_1: Con8.1 U9.2
NetCon8_2: Con8.2 R24.1
NetCon9_1: Con9.1 U5.2
NetCon9_2: Con9.2 R7.1
NetCon10_1: Con10.1 U10.2
NetCon10_2: Con10.2 R8.1
NetCon11_1: Con11.1 U12.2
NetCon11_2: Con11.2 R27.1
NetCon12_1: Con12.1 U13.2
NetCon12_2: Con12.2 R28.1
NetCon13_1: Con13.1 U11.2
NetCon13_2: Con13.2 R31.1
NetCon14_1: Con14.1 U16.2
NetCon14_2: Con14.2 R32.1
NetCon15_1: Con15.1 U14.2
NetCon15_2: Con15.2 R49.1
NetCon16_1: Con16.1 U17.2
NetCon16_2: Con16.2 R39.1
NetCon17_1: Con17.1 U18.2
NetCon17_2: Con17.2 R40.1
NetCon18_1: Con18.1 U15.2
NetCon18_2: Con18.2 R50.1
NetCon19_1: Con19.1 U19.2
NetCon19_2: Con19.2 R51.1
NetCon20_1: Con20.1 U20.2
NetCon20_2: Con20.2 R52.1
NetCon21_1: Con21.1 U21.2
NetCon21_2: Con21.2 R61.1
NetCon22_1: Con22.1 U22.2
NetCon22_2: Con22.2 R62.1
NetCon23_1: Con23.1 U23.2
NetCon23_2: Con23.2 R63.1
NetCon24_1: Con24.1 U24.2
NetCon24_2: Con24.2 R64.1
NetD1_1: D1.1 R3.1 U1.4
NetD1_2: D1.2 Q1.1 R3.2 R5.2
NetD2_1: D2.1 R4.1 U4.4
NetD2_2: D2.2 Q2.1 R4.2 R6.2
NetD3_1: D3.1 R13.1 U2.4
NetD3_2: D3.2 Q3.1 R13.2 R17.2
NetD4_1: D4.1 R14.1 U3.4
NetD4_2: D4.2 Q4.1 R14.2 R18.2
NetD5_1: D5.1 R15.1 U6.4
NetD5_2: D5.2 Q5.1 R15.2 R21.2
NetD6_1: D6.1 R16.1 U7.4
NetD6_2: D6.2 Q6.1 R16.2 R22.2
NetD7_1: D7.1 R19.1 U5.4
NetD7_2: D7.2 Q7.1 R19.2 R25.2
NetD8_1: D8.1 R20.1 U10.4
NetD8_2: D8.2 Q8.1 R20.2 R26.2
NetD9_1: D9.1 R30.1 U9.4
NetD9_2: D9.2 Q10.1 R30.2 R46.2
NetD10_1: D10.1 R29.1 U8.4
NetD10_2: D10.2 Q9.1 R29.2 R45.2
NetD11_1: D11.1 R34.1 U13.4
NetD11_2: D11.2 Q12.1 R34.2 R48.2
NetD12_1: D12.1 R33.1 U12.4
NetD12_2: D12.2 Q11.1 R33.2 R47.2
NetD13_1: D13.1 R35.1 U11.4
NetD13_2: D13.2 Q13.1 R35.2 R37.2
NetD14_1: D14.1 R36.1 U16.4
NetD14_2: D14.2 Q14.1 R36.2 R38.2
NetD15_1: D15.1 R54.1 U15.4
NetD15_2: D15.2 Q18.1 R54.2 R57.2
NetD16_1: D16.1 R56.1 U20.4
NetD16_2: D16.2 Q20.1 R56.2 R59.2
NetD17_1: D17.1 R53.1 U14.4
NetD17_2: D17.2 Q17.1 R53.2 R58.2
NetD18_1: D18.1 R55.1 U19.4
NetD18_2: D18.2 Q19.1 R55.2 R60.2
NetD19_1: D19.1 R41.1 U17.4
NetD19_2: D19.2 Q15.1 R41.2 R43.2
NetD20_1: D20.1 R42.1 U18.4
NetD20_2: D20.2 Q16.1 R42.2 R44.2
NetD21_1: D21.1 R65.1 U21.4
NetD21_2: D21.2 Q21.1 R65.2 R69.2
NetD22_1: D22.1 R67.1 U23.4
NetD22_2: D22.2 Q23.1 R67.2 R71.2
NetD23_1: D23.1 R66.1 U22.4
NetD23_2: D23.2 Q22.1 R66.2 R70.2
NetD24_1: D24.1 R68.1 U24.4
NetD24_2: D24.2 Q24.1 R68.2 R72.2
NetR1_2: R1.2 U1.1
NetR2_2: R2.2 U4.1
NetR7_2: R7.2 U5.1
NetR8_2: R8.2 U10.1
NetR9_2: R9.2 U2.1
NetR10_2: R10.2 U3.1
NetR11_2: R11.2 U6.1
NetR12_2: R12.2 U7.1
NetR23_2: R23.2 U8.1
NetR24_2: R24.2 U9.1
NetR27_2: R27.2 U12.1
NetR28_2: R28.2 U13.1
NetR31_2: R31.2 U11.1
NetR32_2: R32.2 U16.1
NetR39_2: R39.2 U17.1
NetR40_2: R40.2 U18.1
NetR49_2: R49.2 U14.1
NetR50_2: R50.2 U15.1
NetR51_2: R51.2 U19.1
NetR52_2: R52.2 U20.1
NetR61_2: R61.2 U21.1
NetR62_2: R62.2 U22.1
NetR63_2: R63.2 U23.1
NetR64_2: R64.2 U24.1
copper on no net:
  other v3: 3.265,3.114 57.94,98.789 4.215,99.264 151.925,100.025 115.415,100.089

## Polygon pours and split planes (outlines as drawn)
1 on Top Layer "1_L01_P135" (solid, pour order 135): 19 vertices, not listed, extent 22.245,36.204 52.425,129.175
gnd12 on Top Layer "GND12_L01_P084" (solid, pour order 84): 18 vertices, not listed, extent 117.425,122.995 140.477,171.198
NetD15_2 on Top Layer "NETD15_2_L01_P243" (solid, pour order 243): 87.162,78.416 93.387,78.416 93.462,78.341 93.462,71.766 87.137,71.766
gnd17 on Top Layer "GND17_L01_P242" (solid, pour order 242): 134.357,31.985 139,31.985 139,25.227 134.37,25.227
gnd17 on Top Layer "GND17_L01_P241" (solid, pour order 241): 146.732,32.06 152.491,32.06 152.491,25.302 146.745,25.302
+15v17 on Top Layer "+15V17_L01_P240" (solid, pour order 240): 122.323,17.718 140.975,17.718 140.975,22.931 139.2,22.931 139.2,18.605 129.079,18.605 129.079,22.497 122.293,22.497
-5v17 on Top Layer "-5V17_L01_P239" (solid, pour order 239): 117.187,22.025 118.9,22.025 118.9,17.554 142.803,17.554 142.803,23.092 144.403,23.092 144.403,16.175 117.252,16.175
NetD16_1 on Top Layer "NETD16_1_L01_P238" (solid, pour order 238): 141.859,64.542 141.859,68.637 140.173,68.637 140.173,70.045 140.323,70.195 144.672,70.195 144.672,68.637 142.897,68.637 142.897,64.558
NetR52_2 on Top Layer "NETR52_2_L01_P237" (solid, pour order 237): 139.732,59.916 142.188,59.916 142.342,59.762 142.342,56.466 139.732,56.466
NetR51_2 on Top Layer "NETR51_2_L01_P236" (solid, pour order 236): 127.672,59.941 130.128,59.941 130.282,59.787 130.282,56.491 127.672,56.491
gnd11 on Top Layer "GND11_L01_P235" (solid, pour order 235): 93.818,32.478 93.856,32.44 100.1,32.44 100.1,25.865 93.831,25.865
gnd11 on Top Layer "GND11_L01_P234" (solid, pour order 234): 81.518,32.603 81.556,32.565 86.301,32.565 86.301,26.683 85.609,25.99 81.531,25.99
NetD18_1 on Top Layer "NETD18_1_L01_P233" (solid, pour order 233): 129.845,64.458 129.845,68.553 128.158,68.553 128.158,69.962 128.308,70.112 132.657,70.112 132.657,68.553 130.882,68.553 130.882,64.474
NetD15_1 on Top Layer "NETD15_1_L01_P232" (solid, pour order 232): 88.822,65.206 88.822,69.301 87.136,69.301 87.136,70.709 87.286,70.859 91.634,70.859 91.634,69.301 89.859,69.301 89.859,65.222
NetD17_1 on Top Layer "NETD17_1_L01_P231" (solid, pour order 231): 77.826,65.37 77.826,69.464 75.875,69.464 75.875,70.608 76.29,71.023 80.638,71.023 80.638,69.464 78.863,69.464 78.863,65.386
+15v11 on Top Layer "+15V11_L01_P230" (solid, pour order 230): 70.192,18.525 88.182,18.525 88.182,23.305 86.601,23.305 86.601,19.413 76.747,19.413 76.747,23.305 70.162,23.305
-5v14 on Top Layer "-5V14_L01_P229" (solid, pour order 229): 132.685,117.523 136.31,117.523 136.31,113.738 132.5,113.738 132.5,117.523
no net on Top Layer "NONET_L01_P228" (solid, pour order 228): 79.095,117.284 82.72,117.284 82.72,113.498 78.911,113.498 78.911,117.284
-5v11 on Top Layer "-5V11_L01_P226" (solid, pour order 226): 64.918,23.438 66.693,23.438 66.693,19.413 67.993,18.113 89.738,18.113 89.738,23.354 91.449,23.354 91.449,16.75 64.992,16.75
NetD24_1 on Top Layer "NETD24_1_L01_P222" (solid, pour order 222): 141.365,19.422 141.365,23.517 139.679,23.517 139.679,24.926 139.829,25.076 144.178,25.076 144.178,23.517 142.403,23.517 142.403,19.438
NetD22_1 on Top Layer "NETD22_1_L01_P221" (solid, pour order 221): 129.207,18.948 129.207,22.792 127.521,22.792 127.521,24.201 127.671,24.351 132.019,24.351 132.019,22.792 130.244,22.792 130.244,18.964
NetD23_1 on Top Layer "NETD23_1_L01_P220" (solid, pour order 220): 88.432,19.472 88.432,23.567 86.746,23.567 86.746,24.976 86.896,25.126 91.244,25.126 91.244,23.567 89.469,23.567 89.469,19.488
NetD21_1 on Top Layer "NETD21_1_L01_P219" (solid, pour order 219): 76.882,19.447 76.882,23.542 75.196,23.542 75.196,24.951 75.346,25.101 79.694,25.101 79.694,23.542 77.919,23.542 77.919,19.463
-5v17 on Top Layer "-5V17_L01_P218" (solid, pour order 218): 130.691,22.748 134.316,22.748 134.316,18.963 130.506,18.963 130.506,22.748
-5v11 on Top Layer "-5V11_L01_P217" (solid, pour order 217): 78.486,23.485 82.111,23.485 82.111,19.7 78.301,19.7 78.301,23.485
-5v5 on Top Layer "-5V5_L01_P216" (solid, pour order 216): 25.016,23.248 28.641,23.248 28.641,19.463 24.831,19.463 24.831,23.248
no net on Top Layer "NONET_L01_P215" (solid, pour order 215): 142.846,59.677 145.121,59.677 145.121,49.775 142.846,49.775
NetCon19_1 on Top Layer "NETCON19_1_L01_P214" (solid, pour order 214): 130.707,59.902 132.982,59.902 132.982,50 130.707,50
no net on Top Layer "NONET_L01_P213" (solid, pour order 213): 89.744,60.677 92.019,60.677 92.019,50.775 89.744,50.775
no net on Top Layer "NONET_L01_P212" (solid, pour order 212): 78.746,60.402 81.021,60.402 81.021,50.5 78.746,50.5
NetCon14_1 on Top Layer "NETCON14_1_L01_P211" (solid, pour order 211): 36.621,60.377 38.896,60.377 38.896,50.475 36.621,50.475
NetCon13_1 on Top Layer "NETCON13_1_L01_P210" (solid, pour order 210): 25.597,60.602 27.872,60.602 27.872,50.7 25.597,50.7
no net on Top Layer "NONET_L01_P209" (solid, pour order 209): 139.773,54.886 142.229,54.886 142.383,54.732 142.383,49.784 139.773,49.784
NetCon19_2 on Top Layer "NETCON19_2_L01_P208" (solid, pour order 208): 127.859,54.896 130.315,54.896 130.469,54.742 130.469,49.794 127.859,49.794
no net on Top Layer "NONET_L01_P207" (solid, pour order 207): 86.635,55.661 89.091,55.661 89.245,55.507 89.245,50.559 86.635,50.559
no net on Top Layer "NONET_L01_P206" (solid, pour order 206): 75.793,55.771 78.249,55.771 78.403,55.617 78.403,50.669 75.793,50.669
NetCon14_2 on Top Layer "NETCON14_2_L01_P205" (solid, pour order 205): 33.695,55.721 36.151,55.721 36.305,55.567 36.305,50.619 33.695,50.619
NetCon13_2 on Top Layer "NETCON13_2_L01_P204" (solid, pour order 204): 22.48,55.496 24.936,55.496 25.09,55.342 25.09,50.394 22.48,50.394
no net on Top Layer "NONET_L01_P203" (solid, pour order 203): 139.418,9.971 141.874,9.971 142.028,9.817 142.028,4.869 139.418,4.869
no net on Top Layer "NONET_L01_P202" (solid, pour order 202): 127.193,9.146 129.649,9.146 129.803,8.992 129.803,4.044 127.193,4.044
no net on Top Layer "NONET_L01_P201" (solid, pour order 201): 86.143,9.746 88.599,9.746 88.753,9.592 88.753,4.644 86.143,4.644
no net on Top Layer "NONET_L01_P200" (solid, pour order 200): 74.943,9.771 77.399,9.771 77.553,9.617 77.553,4.669 74.943,4.669
NetCon17_2 on Top Layer "NETCON17_2_L01_P199" (solid, pour order 199): 33.218,10.021 35.674,10.021 35.828,9.867 35.828,4.919 33.218,4.919
NetCon24_1 on Top Layer "NETCON24_1_L01_P198" (solid, pour order 198): 142.55,14.477 144.825,14.477 144.825,4.575 142.55,4.575
NetCon23_1 on Top Layer "NETCON23_1_L01_P197" (solid, pour order 197): 130.15,13.952 132.425,13.952 132.425,4.05 130.15,4.05
NetCon22_1 on Top Layer "NETCON22_1_L01_P196" (solid, pour order 196): 89.4,14.452 91.675,14.452 91.675,4.55 89.4,4.55
NetCon21_1 on Top Layer "NETCON21_1_L01_P195" (solid, pour order 195): 78.15,14.402 80.425,14.402 80.425,4.5 78.15,4.5
NetCon17_1 on Top Layer "NETCON17_1_L01_P194" (solid, pour order 194): 36.35,14.527 38.625,14.527 38.625,4.625 36.35,4.625
NetCon16_1 on Top Layer "NETCON16_1_L01_P193" (solid, pour order 193): 24.569,14.492 26.844,14.492 26.844,4.589 24.569,4.589
NetCon16_2 on Top Layer "NETCON16_2_L01_P192" (solid, pour order 192): 21.587,9.814 24.043,9.814 24.197,9.66 24.197,4.712 21.587,4.712
NetD20_1 on Top Layer "NETD20_1_L01_P191" (solid, pour order 191): 35.401,19.546 35.401,23.64 33.715,23.64 33.715,25.049 33.865,25.199 38.53,25.199 38.53,23.64 36.439,23.64 36.439,19.561
gnd5 on Top Layer "GND5_L01_P190" (solid, pour order 190): 41.216,32.444 46.975,32.444 46.975,25.685 41.23,25.685
gnd5 on Top Layer "GND5_L01_P189" (solid, pour order 189): 28.667,32.574 28.704,32.536 33.45,32.536 33.45,26.654 32.758,25.961 28.68,25.961
NetD19_1 on Top Layer "NETD19_1_L01_P188" (solid, pour order 188): 23.392,19.341 23.392,23.435 21.706,23.435 21.706,24.844 21.856,24.994 26.204,24.994 26.204,23.435 24.429,23.435 24.429,19.356
NetD14_1 on Top Layer "NETD14_1_L01_P187" (solid, pour order 187): 35.727,65.017 35.727,69.112 34.041,69.112 34.041,70.52 34.191,70.67 38.54,70.67 38.54,69.112 36.765,69.112 36.765,65.033
+15v5 on Top Layer "+15V5_L01_P186" (solid, pour order 186): 16.826,18.124 35.079,18.124 35.079,23.435 33.451,23.435 33.451,18.799 23.379,18.799 23.379,23.1 16.794,23.1
-5v5 on Top Layer "-5V5_L01_P185" (solid, pour order 185): 11.812,21.923 13.587,21.923 13.587,17.898 36.625,17.898 36.625,23.435 38.225,23.435 38.225,16.825 11.868,16.825
+15v16 on Top Layer "+15V16_L01_P183" (solid, pour order 183): 141.538,68.294 141.538,63.329 138.563,63.329 138.563,68.294
-5v15 on Top Layer "-5V15_L01_P179" (solid, pour order 179): 131.304,64.257 130.651,63.604 119.001,63.604 119.001,66.654 118.176,67.479 116.651,67.479 116.651,62.604 117.126,62.129 132.901,62.129 132.901,64.529 132.901,68.379 131.304,68.379
-5v9 on Top Layer "-5v9" (solid, pour order 178): 79.229,64.957 78.576,64.304 66.926,64.304 66.926,67.354 66.101,68.179 64.576,68.179 64.576,63.304 65.051,62.829 80.826,62.829 80.826,65.229 80.826,69.079 79.229,69.079
-5v3 on Top Layer "-5V3_L01_P177" (solid, pour order 177): 25.979,64.782 25.326,64.129 13.676,64.129 13.676,67.179 12.851,68.004 11.326,68.004 11.326,63.129 11.801,62.654 27.576,62.654 27.576,65.054 27.576,68.904 25.979,68.904
-5v10 on Top Layer "-5V10_L01_P176" (solid, pour order 176): 93.141,69.018 93.141,62.282 90.305,62.282 90.305,69.018
-5v16 on Top Layer "-5V16_L01_P175" (solid, pour order 175): 145.876,68.239 145.876,61.503 143.04,61.503 143.04,68.239
NetR64_2 on Top Layer "NETR64_2_L01_P168" (solid, pour order 168): 139.448,14.563 141.904,14.563 142.058,14.409 142.058,11.113 139.448,11.113
NetR63_2 on Top Layer "NETR63_2_L01_P167" (solid, pour order 167): 127.181,14.113 129.637,14.113 129.791,13.959 129.791,10.663 127.181,10.663
NetR62_2 on Top Layer "NETR62_2_L01_P166" (solid, pour order 166): 86.056,14.713 88.512,14.713 88.666,14.559 88.666,11.263 86.056,11.263
NetR61_2 on Top Layer "NETR61_2_L01_P165" (solid, pour order 165): 75.081,14.713 77.537,14.713 77.691,14.559 77.691,11.263 75.081,11.263
NetR40_2 on Top Layer "NETR40_2_L01_P164" (solid, pour order 164): 33.231,14.688 35.687,14.688 35.841,14.534 35.841,11.238 33.231,11.238
NetR39_2 on Top Layer "NETR39_2_L01_P163" (solid, pour order 163): 21.875,14.551 23.403,14.551 24.125,13.828 24.125,11.101 21.875,11.101
NetR32_2 on Top Layer "NETR32_2_L01_P162" (solid, pour order 162): 33.781,60.488 36.237,60.488 36.391,60.334 36.391,57.038 33.781,57.038
NetR31_2 on Top Layer "NETR31_2_L01_P161" (solid, pour order 161): 22.577,60.438 25.033,60.438 25.187,60.284 25.187,56.988 22.577,56.988
-5v4 on Top Layer "-5V4_L01_P160" (solid, pour order 160): 39.958,68.794 39.958,62.059 37.122,62.059 37.122,68.794
NetD13_1 on Top Layer "NETD13_1_L01_P159" (solid, pour order 159): 24.677,65.092 24.677,69.187 22.991,69.187 22.991,70.595 23.141,70.745 27.202,70.745 27.202,69.187 25.715,69.187 25.715,65.108
+15v10 on Top Layer "+15V10_L01_P154" (solid, pour order 154): 88.597,69.167 88.597,65.017 87.608,64.029 85.622,64.029 85.622,69.142 85.647,69.167
+15v4 on Top Layer "+15V4_L01_P152" (solid, pour order 152): 35.397,68.964 35.397,64.614 32.622,64.614 32.622,68.939 32.647,68.964
+15v15 on Top Layer "+15V15_L01_P151" (solid, pour order 151): 129.751,64.232 129.751,68.407 122.076,68.407 122.076,64.232
+15v9 on Top Layer "+15V9_L01_P150" (solid, pour order 150): 77.601,64.732 77.601,68.907 69.926,68.907 69.926,64.732
+15v3 on Top Layer "+15V3_L01_P149" (solid, pour order 149): 24.351,64.582 24.351,68.757 16.676,68.757 16.676,64.582
NetD24_2 on Top Layer "NETD24_2_L01_P148" (solid, pour order 148): 139.676,32.351 145.901,32.351 145.976,32.276 145.976,25.701 139.651,25.701
NetD22_2 on Top Layer "NETD22_2_L01_P147" (solid, pour order 147): 127.451,32.001 133.676,32.001 133.751,31.926 133.751,25.351 127.426,25.351
NetD23_2 on Top Layer "NETD23_2_L01_P146" (solid, pour order 146): 86.601,32.651 92.826,32.651 92.901,32.576 92.901,26.001 86.576,26.001
NetD20_2 on Top Layer "NETD20_2_L01_P145" (solid, pour order 145): 34.446,32.701 39.226,32.701 40.525,31.402 40.525,26.051 34.421,26.051
NetD21_2 on Top Layer "NETD21_2_L01_P144" (solid, pour order 144): 75.026,32.751 81.251,32.751 81.326,32.676 81.326,26.101 75.001,26.101
NetD19_2 on Top Layer "NETD19_2_L01_P143" (solid, pour order 143): 21.601,32.501 27.826,32.501 27.901,32.426 27.901,25.851 21.576,25.851
NetD16_2 on Top Layer "NETD16_2_L01_P142" (solid, pour order 142): 139.851,77.151 146.076,77.151 146.151,77.076 146.151,70.501 139.826,70.501
NetD18_2 on Top Layer "NETD18_2_L01_P141" (solid, pour order 141): 127.776,77.226 134.001,77.226 134.076,77.151 134.076,70.576 127.751,70.576
NetD17_2 on Top Layer "NETD17_2_L01_P140" (solid, pour order 140): 75.351,78.026 81.576,78.026 81.651,77.951 81.651,71.376 75.326,71.376
NetD14_2 on Top Layer "NETD14_2_L01_P139" (solid, pour order 139): 34.351,78.201 40.576,78.201 40.651,78.126 40.651,71.551 34.326,71.551
NetD13_2 on Top Layer "NETD13_2_L01_P138" (solid, pour order 138): 22.547,77.926 28.772,77.926 28.847,77.851 28.847,71.276 22.522,71.276
3 on Top Layer "3_L01_P137" (solid, pour order 137): 18 vertices, not listed, extent 127.87,35.679 158.65,132.475
2 on Top Layer "2_L01_P136" (solid, pour order 136): 18 vertices, not listed, extent 75.095,36.429 104.85,127.973
gnd_ on Top Layer "GND__L01_P134" (solid, pour order 134): 22.325,137.875 11.65,127.2 11.65,121.625 21.375,121.625 22.3,122.55 22.3,130.425 22.35,130.375 33.972,130.375 33.972,141.075 32.45,141.075 32.45,172.075 29.664,172.082 29.702,141.075 22.325,141.075
gnd4 on Top Layer "GND4_L01_P124" (solid, pour order 124): 20 vertices, not listed, extent 119.23,33.575 158.65,77.375
gnd4 on Top Layer "GND4_L01_P123" (solid, pour order 123): 20 vertices, not listed, extent 66.83,34.2 104.08,78
gnd4 on Top Layer "GND4_L01_P122" (solid, pour order 122): 38 vertices, not listed, extent 13.855,0.175 158.65,77.9
12v_5 on Top Layer "12V_5_L01_P118" (solid, pour order 118): 154.754,94.829 105.493,94.829 105.493,21.779 105.493,18.75 108.518,18.75 108.543,83.754 108.518,83.779 109.143,84.404 154.704,84.404
12v_3 on Top Layer "12V_3_L01_P117" (solid, pour order 117): 101.968,94.679 53.418,94.679 53.418,21.629 53.418,20.05 53.418,18.6 56.468,18.6 56.468,83.604 56.443,83.629 57.068,84.254 101.918,84.254
12v_1 on Top Layer "12V_1_L01_P116" (solid, pour order 116): 49.288,94.329 0.193,94.329 0.193,21.279 0.193,19.975 0.2,18.9 3.243,18.9 3.243,83.254 3.218,83.279 3.843,83.904 49.238,83.904
NetCon6_2 on Top Layer "NETCON6_2_L01_P115" (solid, pour order 115): 140.917,149.085 143.373,149.085 143.527,148.931 143.527,143.983 140.917,143.983
NetCon5_2 on Top Layer "NETCON5_2_L01_P114" (solid, pour order 114): 129.405,149.035 131.861,149.035 132.015,148.881 132.015,143.933 129.405,143.933
NetCon6_1 on Top Layer "NETCON6_1_L01_P113" (solid, pour order 113): 146.199,154.172 146.199,143.872 143.949,143.872 143.949,154.172
NetCon5_1 on Top Layer "NETCON5_1_L01_P112" (solid, pour order 112): 134.619,153.785 134.619,143.485 132.369,143.485 132.369,153.785
gnd14 on Top Layer "GND14_L01_P111" (solid, pour order 111): 148.282,126.129 153.19,126.129 153.19,120.112 153.19,119.37 148.295,119.37
NetCon12_2 on Top Layer "NETCON12_2_L01_P110" (solid, pour order 110): 140.506,104.198 142.962,104.198 143.116,104.044 143.116,99.096 140.506,99.096
NetCon12_1 on Top Layer "NETCON12_1_L01_P109" (solid, pour order 109): 145.74,108.814 145.74,99.315 143.49,99.315 143.49,108.814
NetCon11_1 on Top Layer "NETCON11_1_L01_P108" (solid, pour order 108): 134.125,108.775 134.125,99.276 131.875,99.276 131.875,108.775
NetCon11_2 on Top Layer "NETCON11_2_L01_P107" (solid, pour order 107): 128.837,104.253 131.293,104.253 131.447,104.099 131.447,99.15 128.837,99.15
-5v13 on Top Layer "-5V13_L01_P106" (solid, pour order 106): 147.169,162.534 147.169,156.6 144.332,156.6 144.332,162.534
gnd14 on Top Layer "GND14_L01_P105" (solid, pour order 105): 136.187,126.289 136.224,126.252 140.678,126.252 140.678,120.078 140.277,119.677 136.2,119.677
-5v8 on Top Layer "-5V8_L01_P103" (solid, pour order 103): 79.095,117.284 82.72,117.284 82.72,113.498 78.911,113.498 78.911,117.284
+15v14 on Top Layer "+15V14_L01_P102" (solid, pour order 102): 123.111,112.6 142.438,112.6 142.438,117.35 140.685,117.35 140.693,116.69 140.693,113.275 130.858,113.275 130.858,117.35 123.081,117.35
NetR28_2 on Top Layer "NETR28_2_L01_P101" (solid, pour order 101): 140.676,108.838 142.851,108.838 143.201,108.488 143.201,105.363 140.726,105.363 140.651,105.438
NetR27_2 on Top Layer "NETR27_2_L01_P100" (solid, pour order 100): 128.976,108.863 131.151,108.863 131.501,108.513 131.501,105.388 129.026,105.388 128.951,105.463
NetR12_2 on Top Layer "NETR12_2_L01_P099" (solid, pour order 99): 141.251,153.963 143.426,153.963 143.776,153.613 143.776,150.488 141.301,150.488 141.226,150.563
NetR11_2 on Top Layer "NETR11_2_L01_P098" (solid, pour order 98): 129.476,153.788 131.651,153.788 132.001,153.438 132.001,150.313 129.526,150.313 129.451,150.388
+15v13 on Top Layer "+15V13_L01_P097" (solid, pour order 97): 142.641,162.333 142.641,158.183 142.216,157.758 139.516,157.758 139.516,162.158 139.691,162.333
-5v14 on Top Layer "-5V14_L01_P096" (solid, pour order 96): 117.958,117.538 119.738,117.538 119.738,113.083 121.038,111.783 143.988,111.783 143.988,117.158 144.238,117.408 145.743,117.408 145.743,110.713 145.113,110.083 118.041,110.083
NetD11_1 on Top Layer "NETD11_1_L01_P095" (solid, pour order 95): 142.776,113.578 142.776,117.703 142.742,117.669 140.876,117.669 140.876,119.078 141.026,119.228 145.704,119.228 145.704,117.669 143.763,117.669 143.763,113.593
NetD12_1 on Top Layer "NETD12_1_L01_P094" (solid, pour order 94): 131.105,113.578 131.105,117.703 131.071,117.669 129.205,117.669 129.205,119.078 129.355,119.228 133.555,119.228 133.555,117.669 132.092,117.669 132.092,113.593
NetD6_1 on Top Layer "NETD6_1_L01_P093" (solid, pour order 93): 142.951,158.553 142.951,162.678 142.917,162.644 141.051,162.644 141.051,164.053 141.201,164.203 145.401,164.203 145.401,162.644 143.938,162.644 143.938,158.568
NetD5_1 on Top Layer "NETD5_1_L01_P092" (solid, pour order 92): 131.5,158.474 131.5,162.599 131.467,162.565 129.6,162.565 129.6,163.974 129.75,164.124 133.95,164.124 133.95,162.565 132.488,162.565 132.488,158.489
+15v12 on Top Layer "+15V12_L01_P091" (solid, pour order 91): 131.195,158.183 131.195,162.358 123.225,162.358 123.225,158.183
-5v12 on Top Layer "-5V12_L01_P090" (solid, pour order 90): 132.773,158.244 132.12,157.591 120,157.591 120,161.95 117.675,161.95 117.675,157.037 118.595,156.116 134.37,156.116 134.37,158.516 134.37,162.366 132.773,162.366
NetD11_2 on Top Layer "NETD11_2_L01_P089" (solid, pour order 89): 140.939,126.27 147.164,126.27 147.239,126.195 147.239,119.62 140.914,119.62
NetD12_2 on Top Layer "NETD12_2_L01_P088" (solid, pour order 88): 129.133,126.32 135.358,126.32 135.433,126.245 135.433,119.67 129.108,119.67
NetD6_2 on Top Layer "NETD6_2_L01_P087" (solid, pour order 87): 140.939,171.37 147.164,171.37 147.239,171.295 147.239,164.72 140.914,164.72
NetD5_2 on Top Layer "NETD5_2_L01_P086" (solid, pour order 86): 129.133,171.37 135.358,171.37 135.433,171.295 135.433,164.72 129.108,164.72
3 on Top Layer "3_L01_P085" (solid, pour order 85): 140.75,130.387 140.675,130.313 140.675,129.313 140.675,128.437 158.65,128.437 158.65,172.162 147.45,172.163 147.375,172.238 147.35,167.738 147.35,142.825 140.75,142.825 140.75,138.863
12v_4 on Top Layer "12V_4_L01_P078" (solid, pour order 78): 158.65,188.025 157.291,187.968 106.816,187.968 106.816,114.918 106.791,114.893 107.616,114.068 109.375,114.068 109.375,176.452 110.466,177.543 158.6,177.543
gnd8 on Top Layer "GND8_L01_P077" (solid, pour order 77): 94.011,126.127 98.919,126.127 98.919,120.111 98.919,119.368 94.024,119.368
gnd8 on Top Layer "GND8_L01_P076" (solid, pour order 76): 82.262,126.038 82.299,126.001 86.753,126.001 86.753,119.827 86.353,119.426 82.275,119.426
+15v8 on Top Layer "+15V8_L01_P075" (solid, pour order 75): 69.555,112.391 88.663,112.391 88.663,117.141 88.563,117.141 88.363,117.141 87.129,117.141 87.138,116.481 87.138,113.066 77.302,113.066 77.302,117.141 69.525,117.141
-5v7 on Top Layer "-5V7_L01_P074" (solid, pour order 74): 93.377,162.321 93.377,155.575 90.54,155.575 90.54,162.321
+15v7 on Top Layer "+15V7_L01_P073" (solid, pour order 73): 88.8,162.382 88.8,158.232 88.375,157.807 85.675,157.807 85.675,162.207 85.85,162.382
-5v6 on Top Layer "-5V6_L01_P071" (solid, pour order 71): 78.84,158.13 78.194,157.484 66.544,157.484 66.544,160.534 65.719,161.359 64.194,161.359 64.194,156.484 64.669,156.009 80.444,156.009 80.444,158.409 80.444,162.259 78.84,162.259
+15v6 on Top Layer "+15V6_L01_P070" (solid, pour order 70): 77.15,158.013 77.15,162.188 69.568,162.188 69.568,158.013
NetR24_2 on Top Layer "NETR24_2_L01_P069" (solid, pour order 69): 87.252,108.555 89.427,108.555 89.777,108.205 89.777,105.08 87.302,105.08 87.227,105.155
NetR23_2 on Top Layer "NETR23_2_L01_P068" (solid, pour order 68): 75.565,108.632 77.74,108.632 78.09,108.282 78.09,105.157 75.615,105.157 75.54,105.232
NetR10_2 on Top Layer "NETR10_2_L01_P067" (solid, pour order 67): 87.155,153.839 89.33,153.839 89.68,153.489 89.68,150.364 87.205,150.364 87.13,150.439
NetR9_2 on Top Layer "NETR9_2_L01_P066" (solid, pour order 66): 75.506,153.956 77.681,153.956 78.031,153.606 78.031,150.481 75.556,150.481 75.481,150.556
NetCon4_2 on Top Layer "NETCON4_2_L01_P065" (solid, pour order 65): 87.005,149.109 89.461,149.109 89.615,148.955 89.615,144.007 87.005,144.007
NetCon1_2 on Top Layer "NETCON1_2_L01_P064" (solid, pour order 64): 75.317,148.772 77.773,148.772 77.856,148.689 77.856,143.67 75.317,143.67
NetCon8_2 on Top Layer "NETCON8_2_L01_P063" (solid, pour order 63): 87.005,103.627 89.461,103.627 89.615,103.473 89.615,98.525 87.005,98.525
NetCon7_2 on Top Layer "NETCON7_2_L01_P062" (solid, pour order 62): 75.384,103.659 77.84,103.659 77.994,103.505 77.994,98.557 75.384,98.557
NetCon8_1 on Top Layer "NETCON8_1_L01_P061" (solid, pour order 61): 92.27,108.705 92.27,98.405 90.02,98.405 90.02,108.705
NetCon7_1 on Top Layer "NETCON7_1_L01_P060" (solid, pour order 60): 80.626,108.605 80.626,98.305 78.376,98.305 78.376,108.605
NetCon4_1 on Top Layer "NETCON4_1_L01_P059" (solid, pour order 59): 92.126,153.955 92.126,143.655 89.876,143.655 89.876,153.955
NetCon1_1 on Top Layer "NETCON1_1_L01_P058" (solid, pour order 58): 80.476,153.655 80.476,143.355 78.226,143.355 78.226,153.655
NetD9_1 on Top Layer "NETD9_1_L01_P057" (solid, pour order 57): 88.896,113.473 88.896,117.567 87.21,117.567 87.21,118.976 87.36,119.126 91.421,119.126 91.421,117.567 89.933,117.567 89.933,113.489
NetD10_1 on Top Layer "NETD10_1_L01_P056" (solid, pour order 56): 77.457,113.37 77.457,117.464 75.771,117.464 75.771,118.873 75.921,119.023 79.982,119.023 79.982,117.464 78.494,117.464 78.494,113.385
NetD4_1 on Top Layer "NETD4_1_L01_P055" (solid, pour order 55): 89.046,158.595 89.046,162.689 87.36,162.689 87.36,164.098 87.51,164.248 91.829,164.248 91.829,162.689 90.083,162.689 90.083,158.61
NetD3_1 on Top Layer "NETD3_1_L01_P054" (solid, pour order 54): 77.375,158.416 77.375,162.51 75.689,162.51 75.689,163.919 75.839,164.069 79.9,164.069 79.9,162.51 78.412,162.51 78.412,158.431
-5v8 on Top Layer "-5V8_L01_P053" (solid, pour order 53): 64.413,117.45 66.193,117.45 66.193,112.995 67.493,111.695 90.443,111.695 90.443,117.07 90.693,117.32 92.198,117.32 92.198,110.625 91.568,109.995 64.496,109.995
2 on Top Layer "2_L01_P052" (solid, pour order 52): 87.25,128.758 87.25,127.883 104.85,127.883 104.85,171.608 94.195,171.608 94.12,171.683 94.095,167.183 94.095,144.308 92.237,142.45 87.25,142.45
NetD9_2 on Top Layer "NETD9_2_L01_P051" (solid, pour order 51): 87.077,126.381 93.302,126.381 93.377,126.306 93.377,119.731 87.052,119.731
NetD10_2 on Top Layer "NETD10_2_L01_P050" (solid, pour order 50): 75.502,126.206 81.727,126.206 81.802,126.131 81.802,119.556 75.477,119.556
NetD4_2 on Top Layer "NETD4_2_L01_P049" (solid, pour order 49): 87.227,171.631 93.452,171.631 93.527,171.556 93.527,164.981 87.202,164.981